# EAGLE board AtMEGA32u4-uSD-AddON-v01 (EAGLE 5.11)
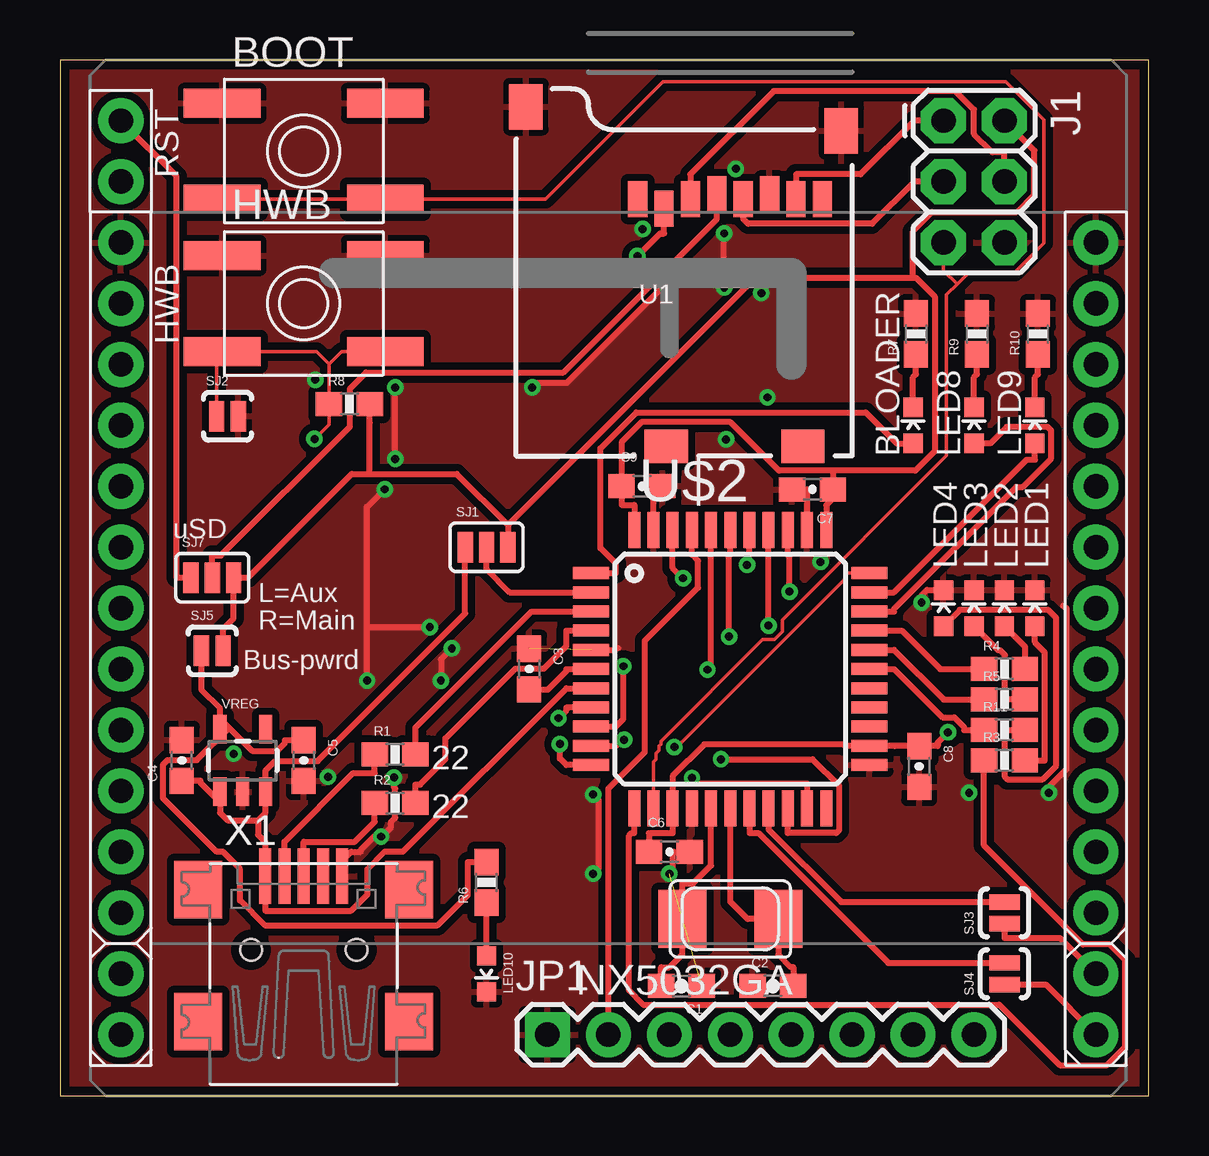
[diagram p0: board, top side]
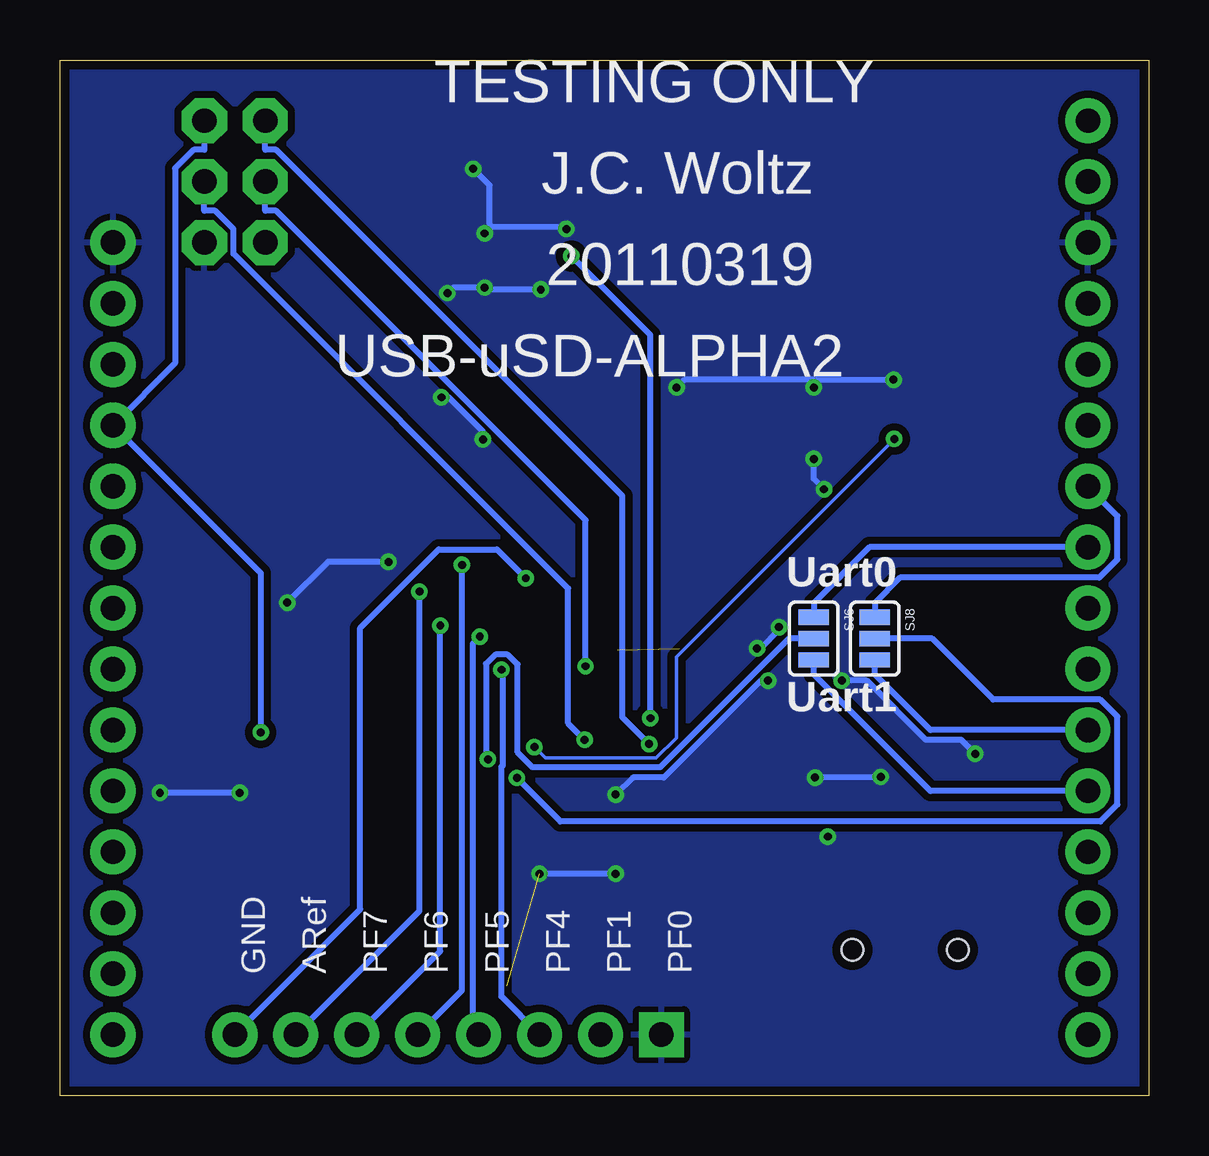
[diagram p1: board, bottom side, seen from below]

Size 45.39 x 43.17 mm. Coordinates in mm from the lower left corner, seen from the top.
Outline: 0,0 45.39,0 45.39,43.17 0,43.17 0,0
Copper layers (1*16): Top 0.0356mm / dielectric 1.5011mm / Bottom 0.0356mm
Design rules "LaenPCBOrder-JCModified": minimum track width 6mil, minimum drill 13mil, track to track 6mil, track to pad 6mil, pad to pad 6mil, via to via 6mil, smd to smd 6mil, copper to edge 15mil, drill to drill 6mil, minimum pad ring 12mil, minimum via ring 7mil, stop-mask expansion 4mil, vias tented up to drill 25mil, thermal gap 10mil
Net classes: 0 default: width 0.203 mm; 1 smallsignal: width 0.152 mm; 2 bigsignal: width 0.356 mm

## Footprints (pad centres in the part's own frame; a part is rotated, then mirrored left to right if it is on the bottom)
LED-0603 = smd 0.8 x 0.8: A 0,-0.75; C 0,0.75
EVQ-Q2 = smd 3.2 x 1.2: A -3.4,-2; A' 3.4,-2; B -3.4,2; B' 3.4,2
0603-CAP = smd 1.1 x 1: 1 -0.85,0; 2 0.85,0
2X3 = drill 1.016 pad 1.88 octagon: 1 0,0; 2 0,2.54; 3 2.54,0; 4 2.54,2.54; 5 5.08,0; 6 5.08,2.54
1X08 = drill 1.016 pad 1.88 square: 1 0,0 | drill 1.016 pad 1.88 round: 2 2.54,0; 3 5.08,0; 4 7.62,0; 5 10.16,0; 6 12.7,0; 7 15.24,0; 8 17.78,0
NX5032 = smd 2 x 2.4: P$1 2,0; P$2 -2,0
0603-RES = smd 1.1 x 1: 1 -0.85,0; 2 0.85,0
SJ_3_PASTE2&3 = smd 0.635 x 1.27: 1 -0.889,0; 2 0,0; 3 0.889,0
SJ_2S-NO = smd 0.635 x 1.27: 1 -0.45,0; 2 0.45,0
SJ_3_PASTE1&2 = smd 0.635 x 1.27: 1 -0.889,0; 2 0,0; 3 0.889,0
MICRO-SD-SOCKET-PP = smd 0.8 x 1.5: 1 -8.94,10.7; 2 -7.84,10.3; 3 -6.74,10.7; 4 -5.64,10.9; 5 -4.54,10.7; 6 -3.44,10.9; 7 -2.34,10.7; 8 -1.24,10.7 | smd 1.8 x 1.4: CD1 -2.05,0.4; CD2 -7.75,0.4 | smd 1.4 x 1.9: GND1 -13.6,14.55; GND3 -0.45,13.55
SYNSJ-STACK = drill 1.016 pad 1.88 round: G0 0,-7.62; G1 0,-10.16; G2 0,-12.7; G3 0,-15.24; G4 0,-17.78; G5 0,-20.32; G6 0,-22.86; G7 0,-25.4; G8 0,-27.94; G9 0,-30.48; G10 0,-33.02; G11 40.64,-33.02; G12 40.64,-30.48; G13 40.64,-27.94; G14 40.64,-25.4; G15 40.64,-22.86; G16 40.64,-20.32; G17 40.64,-17.78; G18 40.64,-15.24; GND 0,-5.08; GND1 40.64,-5.08; R1 0,0; R2 0,-2.54; R3 0,-35.56; R4 0,-38.1; R5 40.64,-38.1; R6 40.64,-35.56; RESERVED 40.64,-10.16; RESET 40.64,-7.62; VCC 40.64,-12.7
TQFP44 = smd 1.5 x 0.5: 1 -5.8,4; 2 -5.8,3.2; 3 -5.8,2.4; 4 -5.8,1.6; 5 -5.8,0.8; 6 -5.8,0; 7 -5.8,-0.8; 8 -5.8,-1.6; 9 -5.8,-2.4; 10 -5.8,-3.2; 11 -5.8,-4; 23 5.8,-4; 24 5.8,-3.2; 25 5.8,-2.4; 26 5.8,-1.6; 27 5.8,-0.8; 28 5.8,0; 29 5.8,0.8; 30 5.8,1.6; 31 5.8,2.4; 32 5.8,3.2; 33 5.8,4 | smd 0.5 x 1.5: 12 -4,-5.8; 13 -3.2,-5.8; 14 -2.4,-5.8; 15 -1.6,-5.8; 16 -0.8,-5.8; 17 0,-5.8; 18 0.8,-5.8; 19 1.6,-5.8; 20 2.4,-5.8; 21 3.2,-5.8; 22 4,-5.8; 34 4,5.8; 35 3.2,5.8; 36 2.4,5.8; 37 1.6,5.8; 38 0.8,5.8; 39 0,5.8; 40 -0.8,5.8; 41 -1.6,5.8; 42 -2.4,5.8; 43 -3.2,5.8; 44 -4,5.8
SOT23-5 = smd 0.55 x 1.2: 1 -0.95,-1.3; 2 0,-1.3; 3 0.95,-1.3; 4 0.95,1.3; 5 -0.95,1.3
USB-MINIB = smd 0.5 x 2.308: D+ 0,4.064; D- -0.8,4.064; GND 1.6,4.064; ID 0.8,4.064; VBUS -1.6,4.064 | smd 2 x 2.4: GND1 -4.4,-2; GND2 -4.4,3.5; GND3 4.4,3.5; GND4 4.4,-2 | hole 0.9: -2.2,1; 2.2,1

## Placement (x,y rotation side)
BLOADER  RED  [LED-0603]  35.56,27.94 0 top
BOOT  EVQQ2  [EVQ-Q2]  10.16,39.37 0 top
C1  12pF  [0603-CAP]  25.91,4.57 180 top
C2  12pF  [0603-CAP]  29.72,4.57 0 top
C3  1uF  [0603-CAP]  19.56,17.78 270 top
C4  1uF  [0603-CAP]  5.08,13.97 90 top
C5  1uF  [0603-CAP]  10.16,13.97 270 top
C6  1uF  [0603-CAP]  25.4,10.16 0 top
C7  1uF  [0603-CAP]  31.37,25.27 180 top
C8  1uF  [0603-CAP]  35.81,13.72 270 top
C9  1uF  [0603-CAP]  24.26,25.4 0 top
HWB  EVQQ2  [EVQ-Q2]  10.16,33.02 0 top
J1  AVR_SPI_PRG_6PTH  [2X3]  36.83,40.64 270 top
JP1  [1X08]  20.32,2.54 0 top
LED1  red  [LED-0603]  40.64,20.32 0 top
LED2  blue  [LED-0603]  39.37,20.32 0 top
LED3  orange  [LED-0603]  38.1,20.32 0 top
LED4  green  [LED-0603]  36.83,20.32 0 top
LED8  RED  [LED-0603]  38.1,27.94 0 top
LED9  RED  [LED-0603]  40.64,27.94 0 top
LED10  GREEN  [LED-0603]  17.78,5.08 180 top
NX5032GA  8MHz  [NX5032]  27.94,7.37 180 top
R1  22  [0603-RES]  13.97,14.22 0 top
R2  22  [0603-RES]  13.97,12.19 0 top
R3  220  [0603-RES]  39.37,13.97 0 top
R4  220  [0603-RES]  39.37,17.78 0 top
R5  220  [0603-RES]  39.37,16.51 0 top
R6  1K  [0603-RES]  17.78,8.89 90 top
R7  1K  [0603-RES]  35.69,31.75 90 top
R8  10K  [0603-RES]  12.06,28.83 0 top
R9  1K  [0603-RES]  38.23,31.75 90 top
R10  1K  [0603-RES]  40.77,31.75 90 top
R11  220  [0603-RES]  39.37,15.24 0 top
SJ1  [SJ_3_PASTE2&3]  17.78,22.86 0 top
SJ2  HWB  [SJ_2S-NO]  6.99,28.32 0 top
SJ3  SOLDERJUMPERNO  [SJ_2S-NO]  39.37,7.62 90 top
SJ4  SOLDERJUMPERNO  [SJ_2S-NO]  39.37,5.08 90 top
SJ5  SOLDERJUMPERNO  [SJ_2S-NO]  6.35,18.54 0 top
SJ6  [SJ_3_PASTE1&2]  13.97,19.05 270 bottom
SJ7  [SJ_3_PASTE1&2]  6.35,21.59 0 top
SJ8  [SJ_3_PASTE1&2]  11.43,19.05 270 bottom
U1  USD-SOCKETNEW  [MICRO-SD-SOCKET-PP]  33.02,26.67 0 top
U$1  SYNAPSE-SJ-STCKINGD30-1600  [SYNSJ-STACK]  2.54,40.64 0 top
U$2  ATMEGA32U4-AU  [TQFP44]  27.94,17.78 0 top
U$5  CREATIVE_COMMONS  [CREATIVE_COMMONS]  15.24,-10.16 0 top  (outside the outline)
VREG  MCP1802  [SOT23-5]  7.62,13.97 0 top
X1  USBSMD  [USB-MINIB]  10.16,5.08 0 top

## Library data of the parts
BLOADER C3-C9 LED1-LED4 LED8-LED10 R1-R11 U$1 VREG X1 = 0_jc-custom
BOOT HWB = adaprog
C1 C2 J1 JP1 SJ1-SJ8 U$5 = SparkFun
NX5032GA U$2 = adafruit
U1 = 0_jc-modified

## Nets
AREF-7: JP1.8 U$2.42
GND: BOOT.B BOOT.B' C1.1 C2.1 C3.1 C4.2 C5.2 C6.2 C7.2 C8.2 C9.2 HWB.B HWB.B' J1.6 JP1.1 LED1.C LED2.C LED3.C LED4.C LED10.C R7.2 R9.2 R10.2 SJ2.2 U1.6 U1.GND1 U1.GND3 U$1.GND U$1.GND1 U$2.5 U$2.15 U$2.23 U$2.35 U$2.43 VREG.2 X1.GND
HWB [smallsignal]: HWB.A HWB.A' R8.1 SJ2.1 U$2.33
MISO: J1.1 U1.7 U$2.11
MOSI: J1.4 U1.3 U$2.10
MVOUT: C5.1 R6.2 SJ5.1 VREG.5
N$1: LED9.C R10.1
N$2: LED1.A R3.2
N$3: SJ7.2 U1.4
N$4: C3.2 U$2.6
N$5: LED4.A R11.2
N$7: LED2.A R4.2
N$8: LED10.A R6.1
N$9: LED8.C R9.1
N$10: BLOADER.C R7.1
N$11: SJ3.1 U$1.R6
N$12: LED3.A R5.2
N$13: SJ4.1 U$1.R5
N$14: SJ8.1 U$1.G3
N$15: SJ6.1 U$1.G4
N$16: SJ8.3 U$1.G7
N$17: SJ6.3 U$1.G8
N$38: U1.CD1
N$40: U1.CD2
PB4-GRN-L4: R11.1 U$2.28
PB5-ORANGE-L3: R5.1 U$2.29
PB6-BLUE-L2: R4.1 U$2.30
PB7-RED-L1: R3.1 U$2.12
PC6-LED8: LED8.A U$2.31
PC7-LED9: LED9.A U$2.32
PD4: U$2.25
PD5: U$2.22
PD6: U$2.26
PD7: U$2.27
PE6-LED-BOOTLOADER: BLOADER.A U$2.1
PF0-2: JP1.2 U$2.41
PF1-3: JP1.3 U$2.40
PF4-4: JP1.4 U$2.39
PF5-5: JP1.5 U$2.38
PF6-6: JP1.6 U$2.37
PF7-7: JP1.7 U$2.36
RESET: U$1.RESET
RST [smallsignal]: BOOT.A BOOT.A' J1.5 U$2.13
RX1: SJ8.2 U$2.21
SCK: J1.3 U1.5 U$2.9
SCL: SJ4.2 U$2.18
SD_CS: U1.2 U$2.8
SDA: SJ3.2 U$2.19
TX1: SJ6.2 U$2.20
UD+: R2.2 U$2.4
UD-: R1.2 U$2.3
UDM: R1.1 X1.D-
UDP: R2.1 X1.D+
UVCC: SJ1.2 U$2.2
VBUS: C4.1 SJ1.1 U$2.7 VREG.1 VREG.3 X1.VBUS
VCC3: C6.1 C7.1 C8.1 C9.1 J1.2 R8.2 SJ1.3 SJ5.2 SJ7.3 U$1.VCC U$2.14 U$2.24 U$2.34 U$2.44
VCC3A: SJ7.1 U$1.R1
XTAL1: C2.2 NX5032GA.P$2 U$2.17
XTAL2: C1.2 NX5032GA.P$1 U$2.16

## Tracks (layer width: path | path; a pad name or v marks a point on that pad's centre or on a via)
AREF-7  (via drill 0.33 pad 0.69)
  Top 0.254: U$2.42 25.54,22 v25.97,21.57
  Bottom 0.254: JP1.8 32.87,7.77 32.87,19.5 29.61,22.77 27.17,22.77 v25.97,21.57
GND  (via drill 0.33)  (2 unrouted)
  Top 0.254: X1.GND 11.76,9.78 12.14,10.16 12.55,10.16 12.55,10.26 13.08,10.79 v13.39,10.79 13.49,10.87 13.79,11.18 13.79,11.4 13.97,11.58 13.97,12.8 13.92,12.85 v13.92,13.26 | X1.GND | U$2.5 22.15,18.57 23.14,18.57 23.14,18.64 23.27,18.65 | U$2.43 24.74,23.7 24.74,25.4 25.1,25.4 C9.2 | C7.2 30.53,25.27 31.14,25.27 31.14,23.7 U$2.35 | v35.92,20.55 35.92,20.85 36.14,21.08 36.78,21.08 LED4.C | v41.22,12.62 41.22,12.88 41.96,13.61 41.96,20.32 41.94,20.34 41.91,20.34 41.81,20.42 | v27.69,33.68 v27.69,35.94 | v25.35,33.6 25.02,33.6 21.13,29.72 19.68,29.72 v19.68,29.52 | v13.97,26.54 v13.97,29.52 | v13.54,25.27 12.8,24.54 12.8,19.53 | v12.8,17.3 12.8,19.53 | v15.42,19.53 12.9,19.53 12.8,19.53 | v16.33,18.64 15.88,18.19 v15.88,17.3 | v22.22,12.55 22.45,12.32 22.45,9.47 v22.22,9.25 | v25.4,9.25 25.55,9.4 25.55,10.13 25.58,10.16 26.06,10.16 26.06,10.19 C6.2
  Bottom 0.254: v13.92,13.26 13.89,13.28 v11.18,13.28 | v27.76,27.36 27.76,27.69 29.18,29.11 v29.49,29.11 | v31.7,22.25 34.21,22.25 v35.92,20.55 | v37.9,12.62 v41.22,12.62 | v29.23,33.45 29.01,33.68 v27.69,33.68 27.58,33.6 v25.35,33.6 | v27.69,35.94 27.41,36.22 | 27.41,36.22 24.38,36.22 v24.28,36.12 | v28.17,38.63 27.48,37.95 27.48,36.32 27.41,36.22 | v19.68,29.52 19.36,29.84 13.97,29.84 | 13.97,29.84 v10.64,29.84 | v13.97,29.52 13.97,29.74 13.97,29.84 | v13.97,26.54 13.97,25.7 v13.54,25.27 | v12.8,17.3 11.76,17.3 9.3,14.83 7.82,14.83 v7.24,14.25 | v15.42,19.53 15.42,19.41 16.18,18.64 v16.33,18.64 | v15.88,17.3 16.18,17.3 20.22,13.26 21.51,13.26 v22.22,12.55 | v22.22,9.25 v25.4,9.25
  pour Bottom (isolate 0.305): 0,45.72 45.72,45.72 45.72,0 0,0
  pour Top (isolate 0.305): 0,45.72 45.72,45.72 45.72,0 0,0
HWB  (via drill 0.33 pad 0.69)
  Top 0.152: v25.61,14.53 25.72,14.53 32.76,21.57 32.76,21.78 U$2.33 | v10.61,27.38 11.21,27.98 R8.1 11.21,29.56 11.21,30.5 | HWB.A' 11.73,31.02 11.73,31.01 11.21,30.5 | 11.21,30.5 10.69,31.02 8.59,31.02 HWB.A 6.53,30.8 SJ2.1
  Bottom 0.152: v25.61,14.53 25.15,14.07 20.54,14.07 19.69,14.92 19.69,18.3 v10.61,27.38
MISO  (via drill 0.33 pad 0.69)
  Top 0.254: U$2.11 21.11,13.78 20.83,14.06 v20.83,14.65 | J1.1 35.61,40.64 33.37,38.4 30.68,38.4 U1.7
  Bottom 0.254: J1.1 36.83,39.42 36.37,39.42 21.95,25 21.95,15.77 v20.83,14.65
MOSI  (via drill 0.33 pad 0.69)
  Top 0.254: U$2.10 23.17,14.58 23.42,14.83 v23.52,14.83 | J1.4 39.37,39.32 38.87,39.32 38.1,40.08 38.1,41.1 37.33,41.87 29.75,41.87 26.28,38.4 U1.3
  Bottom 0.254: J1.4 39.37,36.88 38.91,36.88 38.15,36.12 38.15,35.09 24.2,21.14 24.2,15.52 v23.52,14.83
MVOUT
  Top 0.254: 7.04,15.33 6.67,15.71 | 7.04,15.33 8,14.37 9.05,14.37 9.38,14.71 9.38,14.82 C5.1 | 7.04,15.33 5.7,13.99 4.49,13.99 4.3,13.8 4.3,12.4 6.53,10.16 6.79,10.16 7.5,9.45 7.5,8.13 8.54,7.1 15.74,7.1 17,8.36 17,9.74 R6.2 | 6.67,15.71 6.67,16.15 5.9,16.92 SJ5.1 | 6.67,15.71 VREG.5
N$1
  Top 0.254: R10.1 40.77,30.07 40.64,29.94 LED9.C
N$2
  Top 0.254: LED1.A 40.64,18.89 41.05,18.48 41.05,13.97 R3.2
N$3
  Top 0.254: SJ7.2 6.35,22.5 6.7,22.5 12.08,27.89 12.08,29.47 12.76,30.14 20.98,30.14 27.38,36.54 U1.4
N$4
  Top 0.254: U$2.6 21.11,17.78 21.11,17.7 20.34,16.93 C3.2
N$5
  Top 0.254: R11.2 39.39,15.24 39.39,13.28 39.48,13.19 40.96,13.19 41.52,13.75 41.52,19.92 41.19,20.25 37.51,20.25 LED4.A
N$7
  Top 0.254: R4.2 40.22,18.72 LED2.A
N$8
  Top 0.254: LED10.A R6.1
N$9
  Top 0.254: R9.1 38.23,30.07 38.1,29.94 LED8.C
N$10
  Top 0.254: R7.1 35.69,30.07 35.56,29.94 BLOADER.C
N$11
  Top 0.254: SJ3.1 39.37,6.57 41.69,6.57 U$1.R6
N$12
  Top 0.254: R5.2 39.39,16.51 39.39,18.36 39.19,18.56 39.11,18.56 LED3.A
N$13
  Top 0.254: U$1.R5 41.09,4.63 SJ4.1
N$14
  Bottom 0.254: SJ8.1 11.43,20.54 10.38,21.59 2.07,21.59 1.31,22.36 1.31,24.17 U$1.G3
N$15
  Bottom 0.254: SJ6.1 13.97,20.54 11.65,22.86 U$1.G4
N$16
  Bottom 0.254: SJ8.3 11.43,17.56 9.11,15.24 U$1.G7
N$17
  Bottom 0.254: SJ6.3 13.97,17.56 9.11,12.7 U$1.G8
PB4-GRN-L4
  Top 0.254: R11.1 37.69,15.24 37.69,15.35 37.28,15.76 36.79,15.76 34.77,17.78 U$2.28
PB5-ORANGE-L3
  Top 0.254: U$2.29 34.77,18.58 36.84,16.51 R5.1
PB6-BLUE-L2
  Top 0.254: U$2.30 35.09,19.38 36.69,17.78 R4.1
PB7-RED-L1
  Top 0.254: U$2.12 23.94,10.95 23.83,10.95 23.72,10.84 23.72,4.38 24.31,3.79 39.15,3.79 41.67,1.27 43.64,1.27 44.4,2.04 44.4,5.66 43.76,6.3 42.64,6.3 38.52,10.42 R3.1
PC6-LED8
  Top 0.254: LED8.A 38.78,27.19 39.46,27.87 41.18,27.87 41.32,27.73 41.32,26.56 40.14,25.38 39.86,25.38 34.77,20.29 34.77,20.18 U$2.31
PC7-LED9
  Top 0.254: LED9.A 40.64,26.51 40.3,26.51 34.77,20.98 U$2.32
PE6-LED-BOOTLOADER
  Top 0.254: BLOADER.A 34.88,27.19 33.59,28.48 24.03,28.48 22.53,26.98 22.53,22.82 23.17,22.18 23.17,21.78 U$2.1
PF0-2
  Top 0.254: U$2.41 26.34,22.55 26.6,22.29 26.6,21.17 24.38,18.96 24.38,14.32 22.86,12.8 JP1.2
PF1-3  (via drill 0.33 pad 0.69)
  Top 0.254: v26.99,17.76 27.14,17.91 27.14,22.55 U$2.40
  Bottom 0.254: v26.99,17.76 26.93,17.7 26.93,13.76 26.99,13.7 26.99,4.13 JP1.3
PF4-4  (via drill 0.33 pad 0.69)
  Top 0.254: U$2.39 27.94,22.55 27.89,22.5 v27.89,19.13
  Bottom 0.254: JP1.4 28.17,2.77 28.17,18.85 v27.89,19.13
PF5-5  (via drill 0.33 pad 0.69)
  Top 0.254: U$2.38 28.74,22.55 28.64,22.45 v28.64,22.12
  Bottom 0.254: v28.64,22.12 28.64,4.38 JP1.5
PF6-6  (via drill 0.33 pad 0.69)
  Top 0.254: U$2.37 29.54,22.55 v29.54,19.59
  Bottom 0.254: v29.54,19.59 29.54,6.02 JP1.6
PF7-7  (via drill 0.33 pad 0.69)
  Top 0.254: U$2.36 30.34,22.55 30.41,22.48 v30.41,21.01
  Bottom 0.254: v30.41,21.01 30.41,7.69 JP1.7
RST
  Top 0.152: 37.4,33.82 36.96,33.38 36.96,26.68 30.11,19.84 30.11,19.35 29.77,19.02 29.29,19.02 25.04,14.77 25.04,14.64 24.97,14.57 24.97,14.38 24.85,14.26 24.85,14.02 24.74,13.91 24.74,12.96 U$2.13 | BOOT.A BOOT.A' 20.24,37.37 25.13,42.26 39.43,42.26 41.01,40.68 41.01,35.55 39.8,34.34 37.91,34.34 37.4,33.82 | 37.4,33.82 36.83,34.39 J1.5
RX1  (via drill 0.33 pad 0.69)
  Top 0.254: U$2.21 31.14,13.01 26.58,13.01 v26.34,13.24
  Bottom 0.254: v26.34,13.24 24.53,11.43 2.02,11.43 1.32,12.13 1.32,15.8 2.03,16.51 6.49,16.51 9.03,19.05 SJ8.2
SCK  (via drill 0.33 pad 0.69)
  Top 0.254: U$2.9 23.17,15.38 23.48,15.69 v23.48,17.9 | U1.5 28.48,36.54 28.68,36.34 33.85,36.34 35.61,38.1 J1.3
  Bottom 0.254: J1.3 36.83,36.88 36.37,36.88 23.48,23.99 v23.48,17.9
SCL
  Top 0.254: U$2.18 28.74,10.95 29.11,10.95 34.53,5.53 SJ4.2
SD_CS  (via drill 0.33 pad 0.69)
  Top 0.254: U1.2 25.18,35.94 25.02,35.94 v24.07,35 | U$2.8 21.11,16.18 21.11,16.06 v20.78,15.73
  Bottom 0.254: v24.07,35 20.78,31.71 v20.78,15.73
SDA
  Top 0.254: U$2.19 29.54,11.09 32.56,8.07 SJ3.2
TX1  (via drill 0.33 pad 0.69)
  Top 0.254: U$2.20 30.34,10.95 32.36,10.95 32.47,11.06 32.47,12.92 31.37,14.02 v27.55,14.02
  Bottom 0.254: v27.55,14.02 27.63,14.1 27.63,17.99 27.24,18.39 26.73,18.39 26.32,17.97 26.32,14.31 25.69,13.69 20.37,13.69 15.01,19.05 SJ6.2
UD+
  Top 0.254: R2.2 14.82,12.97 15.02,12.97 16.07,14.03 16.07,14.89 18.98,17.8 20.18,17.8 21.11,18.73 21.11,19.38 U$2.4
UD-
  Top 0.254: U$2.3 19.66,20.18 14.82,15.34 R1.2
UDM
  Top 0.254: R1.1 13.12,13.44 12.23,13.44 9.36,10.58 X1.D-
UDP
  Top 0.254: R2.1 13.12,11.41 12.29,10.58 10.16,10.58 X1.D+
UVCC
  Top 0.254: SJ1.2 17.78,21.95 18.75,20.98 U$2.2
VBUS
  Top 0.254: SJ1.1 16.89,20.1 10.74,13.95 8.97,13.95 8.57,13.55 VREG.3 8.57,12.23 8.57,11.79 8.26,11.48 | C4.1 5.86,13.12 5.86,13.04 6.67,12.23 | 6.67,12.23 6.67,11.79 6.98,11.48 8.26,11.48 | VREG.1 6.67,12.23 | U$2.7 21.11,16.98 14.3,10.17 13.54,10.17 12.81,9.45 12.81,8.39 12.14,7.71 8.56,7.71 X1.VBUS 8.56,10.58 8.26,10.88 8.26,11.48
VCC3  (via drill 0.33 pad 0.69)
  Top 0.254: U$2.44 23.94,24.61 23.93,24.62 23.41,24.62 C9.1 23.41,27.24 24.24,28.07 27.95,28.07 29.97,26.05 32.22,26.05 | 35.55,34.09 28.99,34.09 18.67,23.77 | 32.22,26.05 35.65,26.05 36.47,26.87 36.47,33.31 35.68,34.09 35.55,34.09 | 35.55,34.09 35.55,36.03 36.35,36.83 39.88,36.83 40.62,37.57 40.62,39.39 J1.2 | 32.22,26.05 C7.1 32.22,24.89 31.94,24.61 U$2.34 | 18.67,23.77 SJ1.3 | v37.02,15.14 36.59,14.72 36.59,14.57 36.2,14.57 C8.1 34.78,14.57 34.77,14.58 U$2.24 32.71,14.58 32.65,14.64 26.86,14.64 25.54,13.32 25.54,13.01 U$2.14 25.54,11.47 25.54,10.95 25.53,10.94 24.55,10.94 C6.1 | 12.91,25.91 16.53,25.91 18.67,23.77 | 12.91,25.91 12.91,28.05 R8.2 | 12.91,25.91 12.16,25.91 7.84,21.59 SJ7.3 7.24,19.9 6.8,19.46 SJ5.2
  Bottom 0.254: v37.02,15.14 37.02,21.78 U$1.VCC 40.59,30.53 40.59,38.66 39.83,39.42 39.37,39.42 J1.2
VCC3A
  Top 0.254: SJ7.1 4.86,21.59 4.86,38.32 U$1.R1
XTAL1
  Top 0.254: C2.2 30.57,5.35 30.47,5.35 29.94,5.89 NX5032GA.P$2 28.66,7.37 27.94,8.09 U$2.17
XTAL2
  Top 0.254: C1.2 25.06,5.35 25.4,5.35 25.94,5.89 NX5032GA.P$1 25.94,8.85 26.39,8.85 27.14,9.6 U$2.16

## Text on the board
tPlace: RST | HWB | uSD | L=Aux | R=Main | Bus-pwrd
bPlace: TESTING ONLY | J.C. Woltz | 20110319 | USB-uSD-ALPHA2 | Uart0 | Uart1 | PF0 | PF1 | PF4 | PF5 | PF6 | PF7 | ARef | GND